# Altium PCB bms52Pcb.PcbDoc (part 1 of 2)
Units mm, origin at the board's own origin, x right, y up, seen from the top; angles counter-clockwise.
Board outline 103.58 x 54.94 mm, 2 copper layers (Top Layer, Bottom Layer); 108 components, 83 nets, 349 pads, 97 vias.
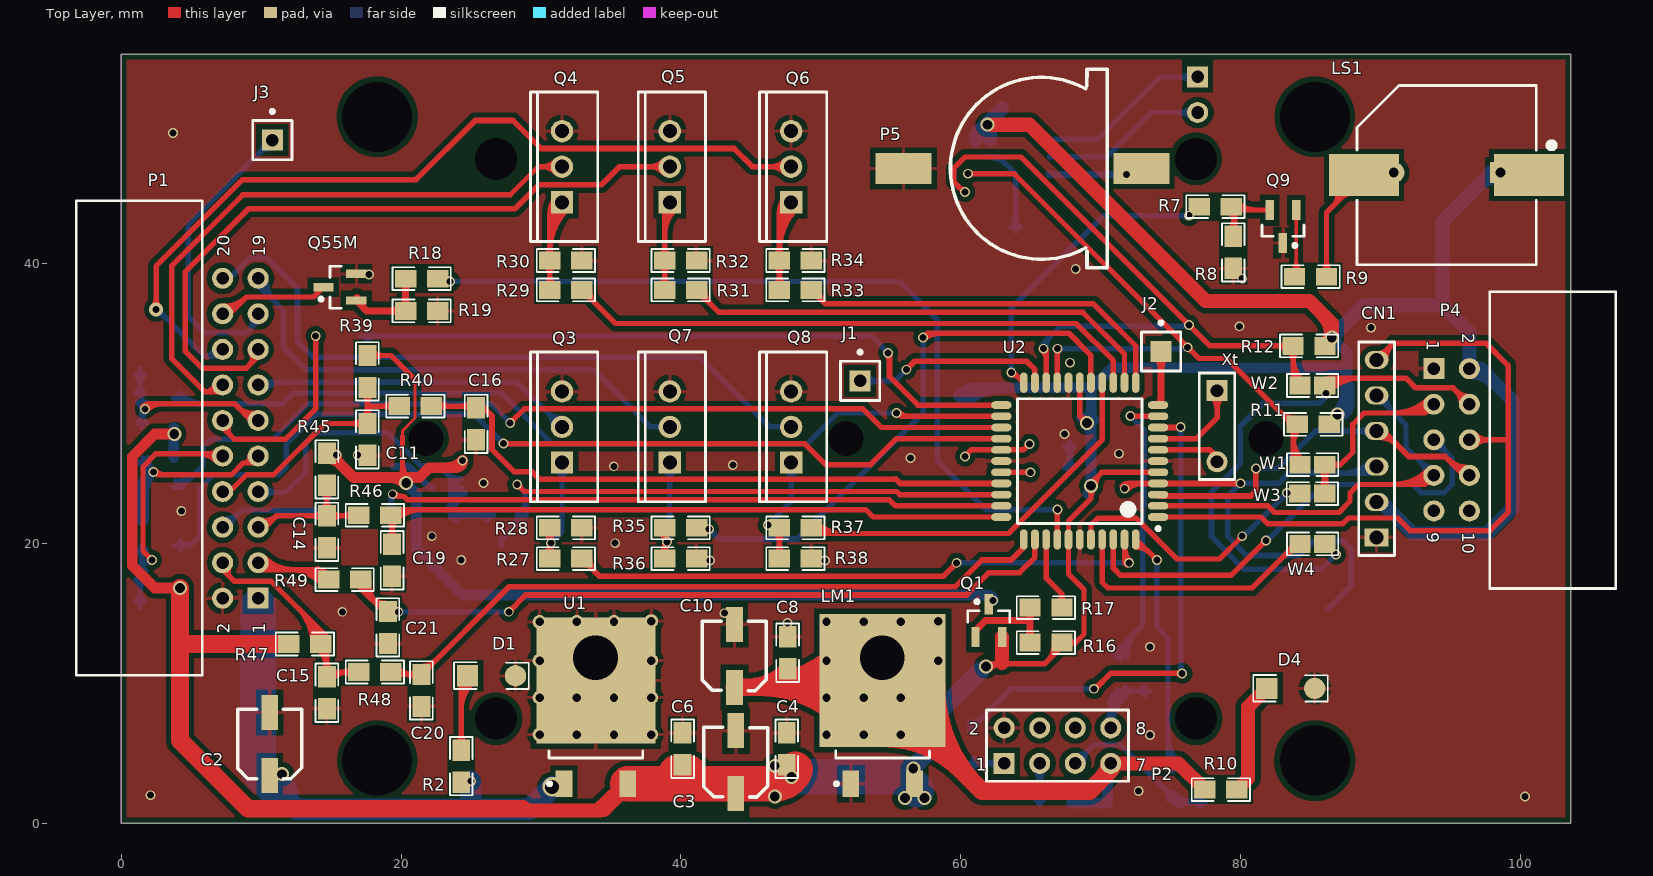
[diagram p0: Top Layer view]
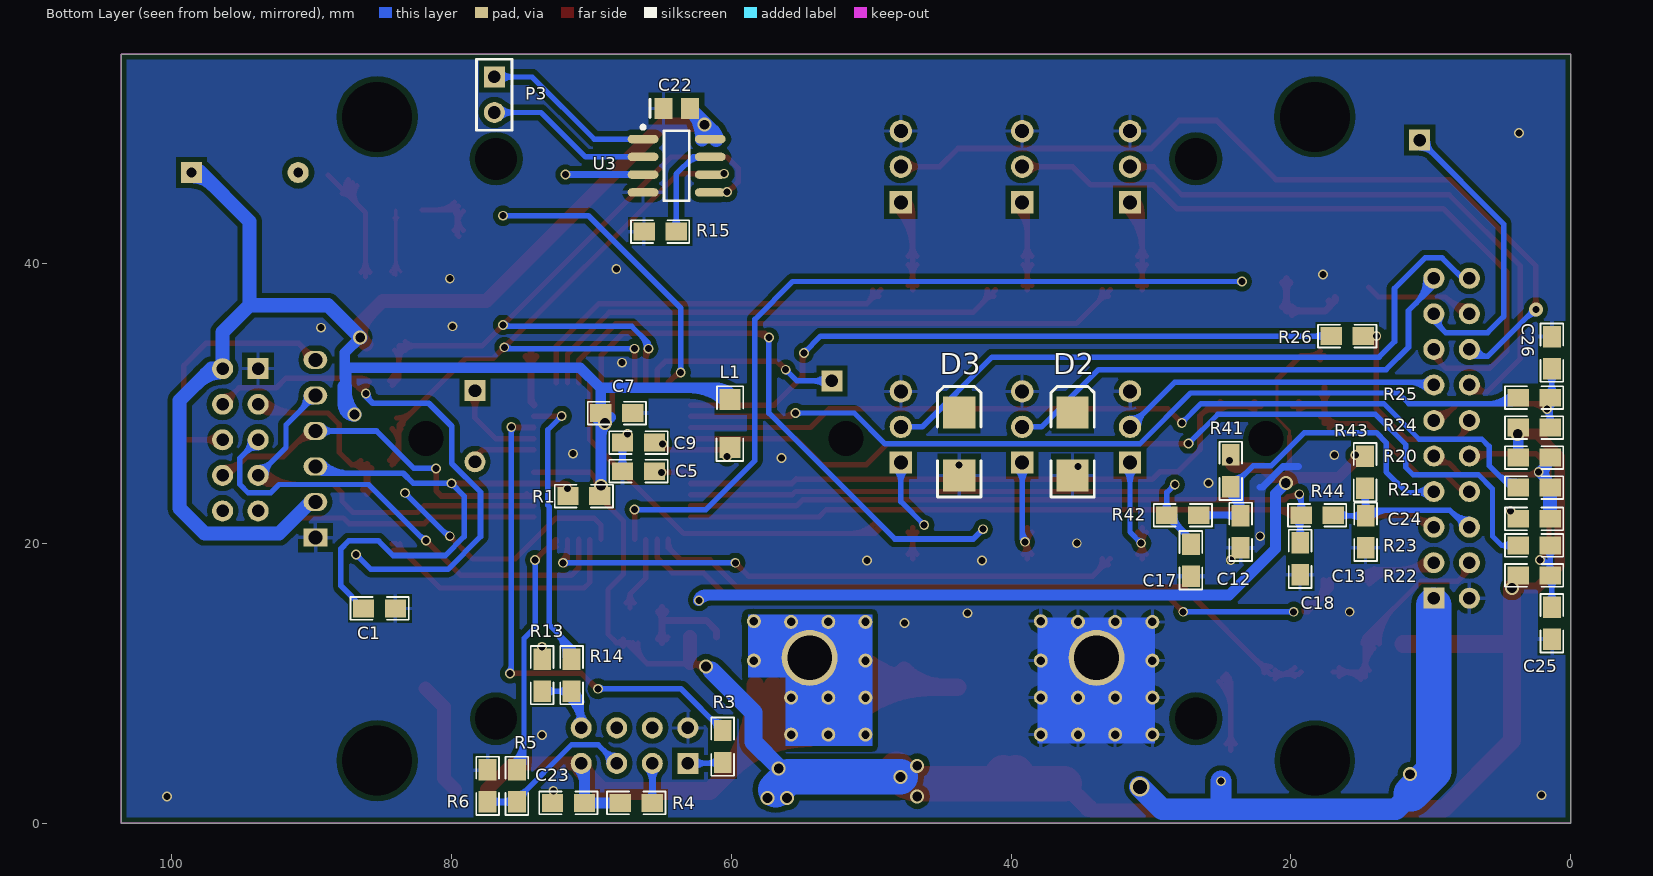
[diagram p1: Bottom Layer view, seen from below]

## Layer stack, top to bottom
Top Layer: signal copper 0.0356
Dielectric: dielectric 0.32, FR-4, Dk 4.8
Bottom Layer: signal copper 0.0356

## Board outline
0,0 103.58,0 103.58,54.94 0,54.94

## Design rules (kind name [scope] priority, off if disabled: settings)
Clearance Clearance_1 [All vs inpolygon] p1: gap=0.381
Clearance [All] p2: gap=0.2
ComponentClearance [All] p1: gap=0.051 collisioncheckmode=3 verticalgap=0.051 showdistances=FALSE
DiffPairsRouting [All] p1: maxlimit=5 minlimit=0.003 mostfreqgap=0.254 maxuncoupledlength=12.7
HoleToHoleClearance [All] p1: gap=0.254 allowstackedmicrovias=FALSE
MinimumSolderMaskSliver [All] p1: minsoldermaskwidth=0.025
PolygonConnect PolygonConnect_1 [All vs InNet('GND') and ViaDiameter] p1: connectstyle=Direct reliefconductorwidth=0.254 reliefentries=4 polygonreliefangle="90 Angle"
PolygonConnect [All] p2: connectstyle=Relief reliefconductorwidth=0.254 reliefentries=4 polygonreliefangle="90 Angle"
RoutingVias [All] p1: holewidth=0.5 width=0.8 viastyle="Through Hole" minholewidth=0 minwidth=0.3 maxholewidth=5 maxwidth=5
SilkscreenOverComponentPads [All] p1: minsilkscreentomaskgap=0.01
SolderMaskExpansion [All] p1: expansion=0.01
TestPointUsage [All] p1: valid=0 allowmultiple=FALSE
Testpoint [(IsPad And (OnTopLayer Or OnBottomLayer))] p1: side=3 testpointundercomponent=TRUE minsize=1.016 maxsize=2.54 preferedsize=1.524 minholesize=0 maxholesize=1.016 preferedholesize=0.813 testpointgrid=0.025 style=297 order=0123456789
Width [All] p1: maxlimit=5.08 minlimit=0.2 preferedwidth=0.7
19 further rules are at their usual default settings.

## Components (designator, comment, footprint, x,y, rotation, side; value= is the part's Value field where it differs from the comment)
C1 "10uF/10v" C0805N 85.2,15.3 r180 bottom
C2 "220uF/10V" 100uf16V 10.6,5.9 r270 top
C3 "100uF/10V" 100uf16V 43.9,4.6 r270 top
C4 "10uF/10V" C0805N 47.6,5.235 r90 top
C5 "Cap" C0805#1 66.59,25.17 r180 bottom
C6 "Y" C0805#1 40.09,5.343 r90 top
C7 "Cap" C0805#1 68.19,29.27 r0 bottom
C8 "Y" C0805#1 47.6,12.2 r90 top
C9 "Cap" C0805#1 66.641,27.17 r0 bottom
C10 "100uF/10V" 100uf16v 43.8,12.2 r270 top
C11 "22uF/10V" C0805N 17.558,27.5 r270 top
C12 "22uF/10V" C0805N 23.642,20.9 r270 bottom
C13 "22uF/10V" C0805N 14.7,20.9 r270 bottom
C14 "22uF/10V" C0805N 14.658,20.9 r270 top
C15 "22uF/10V" C0805N 14.658,9.4 r270 top
C16 "Cap" C0805N 25.4,28.448 r90 top
C17 "Cap" C0805N 27.1,18.7 r90 bottom
C18 "Cap" C0805N 19.3,18.8 r90 bottom
C19 "Cap" C0805N 19.4,18.7 r90 top
C20 "Cap" C0805N 21.5,9.4 r90 top
C21 "Cap" C0805N 19.1,13.9 r90 top
C22 "Cap" C0805#2 63.89,51.07 r180 bottom
C23 "Y" C0805n 71.7,1.4 r180 bottom
C24 "Y" C0805n 2.708,21.7 r180 bottom
C25 "Y" C0805n 1.313,14.2 r90 bottom
C26 "Y" C0805n 1.4,33.7 r270 bottom
CN1 "Pin Header 6" HDR1X6 89.7,20.4 r90 top
D1 "RLED" D1206 26.7,10.4 r0 top
D2 "D Schottky" SMB 35.6,27.1 r90 bottom
D3 "D Schottky" SMB 43.7,27.1 r90 bottom
D4 "RLED" D1206 83.8,9.5 r0 top
J1 "Socket" PIN1#1 52.8,31.6 r0 top
J2 "Socket" PIN1#2 74.3,33.7 r0 top
J3 "Socket" PIN1#1 10.8,48.8 r0 top
L1 "Inductor" R1206 60.19,28.47 r90 bottom
LM1 "LM1117DT-3.3" TD03B_N_Heat#1 46.69,-5.83 r0 top
LS1 "Buzzer" ABSM-1574 100.6,46.3 r180 top
P1 "Header 10X2" HDR2X10 9.79,16.07 r90 top
P2 "Header 4X2H" HDR2X4 63.09,4.27 r0 top locked
P3 "xtall" HDR1X2 76.99,51.97 r270 bottom
P4 "Header 5X2" HDR2X5 93.79,32.47 r270 top
P5 "JackBattery" "jack battery" 64.39,46.77 r90 top
Q1 "PNP" NPN 62,14.3 r0 top
Q3 "TIP122" TO-220-AB 31.5,28.31 r90 top
Q4 "TIP122" TO-220-AB 31.5,46.9 r90 top
Q5 "TIP122" TO-220-AB 39.2,46.9 r90 top
Q6 "TIP122" TO-220-AB 47.87,46.9 r90 top
Q7 "TIP122" TO-220-AB 39.2,28.31 r90 top
Q8 "TIP122" TO-220-AB 47.87,28.31 r90 top
Q9 "QNPN" NPN 83,42.8 r180 top
Q55M "BC817" NPN 15.8,38.3 r90 top
R1 "" R0805 70.49,23.37 r180 bottom
R2 "10K" R0805 24.3,4.1 r90 top
R3 "1K" R0805 60.6,5.5 r90 bottom
R4 "1K" R0805 66.8,1.442 r0 bottom
R5 "1K" R0805 75.3,2.645 r270 bottom
R6 "2.2K" R0805 77.4,2.695 r90 bottom
R7 "1K" C0805N 78.1,44 r0 top
R8 "10K" C0805n 79.5,40.7 r90 top
R9 "100R" C0805N 84.9,39 r0 top
R10 "10K" R0805 78.6,2.4 r0 top
R11 "10K" R0805 85.2,28.5 r0 top
R12 "10K" R0805 84.849,34.1 r180 top
R13 "2.2K" R0805 73.5,10.6 r90 bottom
R14 "1K" R0805 71.4,10.6 r90 bottom
R15 "10K" R0805 65.09,42.27 r0 bottom
R16 "10K" R0805 66.1,12.9 r0 top
R17 "1K" R0805 66.1,15.4 r0 top
R18 "1K" R0805 21.5,38.9 r0 top
R19 "10K" R0805 21.5,36.6 r0 top
R20 "10K" R0805 2.6,26.12 r180 bottom
R21 "100R" R0805 2.6,23.98 r180 bottom
R22 "10K" R0805 2.6,17.7 r180 bottom
R23 "100R" R0805 2.6,19.84 r180 bottom
R24 "10K" R0805 2.6,28.26 r180 bottom
R25 "100R" R0805 2.6,30.4 r180 bottom
R26 "470R" R0805 15.949,34.8 r180 bottom
R27 "1K" R0805 31.749,18.9 r180 top
R28 "10K" R0805 31.8,21.1 r0 top
R29 "1K" R0805 31.749,38.1 r180 top
R30 "10K" R0805 31.8,40.2 r0 top
R31 "1K" R0805 39.949,38.1 r180 top
R32 "10K" R0805 40,40.2 r0 top
R33 "1K" R0805 48.149,38.1 r180 top
R34 "10K" R0805 48.2,40.2 r0 top
R35 "1K" R0805 39.949,21.1 r180 top
R36 "10K" R0805 40,18.9 r0 top
R37 "1K" R0805 48.149,21.1 r180 top
R38 "10K" R0805 48.2,18.9 r0 top
R39 "10K" R0805 17.6,32.3 r90 top
R40 "100R" R0805 21,29.8 r180 top
R41 "10K" R0805 24.3,25.2 r90 bottom
R42 "100R" R0805 27.7,22 r180 bottom
R43 "10K" R0805 14.7,25.1 r90 bottom
R44 "100R" R0805 18.1,22 r180 bottom
R45 "10K" R0805 14.7,25.3 r90 top
R46 "100R" R0805 18.1,22 r180 top
R47 "10K" R0805 13.1,12.8 r180 top
R48 "100R" R0805 18.1,10.8 r180 top
R49 "100R" R0805 15.945,17.4 r180 top
U1 "MC7805CD2T" TD03B_N_Heat#2 26.19,-5.83 r0 top
U2 "ATmega32L-8AI" 44A_L 68.49,25.87 r180 top
U3 "DS1307Z" SOIC8N_N 63.89,46.97 r180 bottom
W1 "Jumper" jumper 85.113,25.36 r0 top
W2 "Jumper" jumper 85.113,31.019 r0 top
W3 "Jumper" jumper 85.1,23.3 r0 top
W4 "Jumper" jumper 85.113,19.7 r0 top
Xt "Header 3" HDR1X3 78.3,30.9 r270 top (schematic designator P6)

## Footprints (in the part's own frame and the unit in brackets; to place one, negate y for a bottom-side part, rotate by r counter-clockwise, add the part's x,y. Pads: shape width x height; smd on the part's side, far side on the other; paste and mask are expansions set on the pad)
44A_L [mm] "Thin QFP, 44-Leads, Body 10x10mm, Pitch 0.8mm, IPC High Density"
  oval 1.45x0.55 smd: 1(-5.6,4) 2(-5.6,3.2) 3(-5.6,2.4) 4(-5.6,1.6) 5(-5.6,0.8) 6(-5.6,0) 7(-5.6,-0.8) 8(-5.6,-1.6) 9(-5.6,-2.4) 10(-5.6,-3.2) 11(-5.6,-4) 23(5.6,-4) 24(5.6,-3.2) 25(5.6,-2.4) 26(5.6,-1.6) 27(5.6,-0.8) 28(5.6,0) 29(5.6,0.8) 30(5.6,1.6) 31(5.6,2.4) 32(5.6,3.2) 33(5.6,4)
  oval 0.55x1.45 smd: 12(-4,-5.6) 13(-3.2,-5.6) 14(-2.4,-5.6) 15(-1.6,-5.6) 16(-0.8,-5.6) 17(0,-5.6) 18(0.8,-5.6) 19(1.6,-5.6) 20(2.4,-5.6) 21(3.2,-5.6) 22(4,-5.6) 34(4,5.6) 35(3.2,5.6) 36(2.4,5.6) 37(1.6,5.6) 38(0.8,5.6) 39(0,5.6) 40(-0.8,5.6) 41(-1.6,5.6) 42(-2.4,5.6) 43(-3.2,5.6) 44(-4,5.6)
  silkscreen extent -5.72,-4.45 4.45,4.95, body extent -5,-5 5,5, height 1.2
100uf16V [mm]
  rect 2.5x1.2 smd: 1(2.496,0.017) 2(-2.004,0.017)
  silkscreen extent -2.24,-2.27 2.73,2.3, body extent -2.24,-2.27 2.76,2.3, height 5.6
100uf16v [mm]
  rect 2.5x1.2 smd: 1(2.496,0.017) 2(-2.004,0.017)
  silkscreen extent -2.24,-2.27 2.73,2.3, body extent -2.24,-2.27 2.76,2.3, height 5.6
ABSM-1574 [mm] "Magnetic Transducer Buzzer"
  rect 5x3 smd: 1(0,0) 2(11.8,0)
  rect 1.5x1.5 hole 0.7: 1A(2.048,-0.182)
  round 1.5 hole 0.7: 2A(9.668,-0.182)
  silkscreen extent -1.83,-6.4 12.3,6.4
C0805#1 [mil]
  rect 60x50 smd: 1(44,-1) 2(-46,-1)
  silkscreen extent -83,-33 81,31, body extent -60,-27 58,25, height 43
C0805#2 [mil] "Chip Capacitor; Body 2.0 x 1.2 mm (LxW typ)"
  rect 51.18x59.06 smd: 1(-37.4,0) 2(37.4,0)
  silkscreen extent -75,-26 -75,26
C0805N [mil]
  rect 60x50 smd: 1(-41.76,1.67) 2(48.24,1.67)
  silkscreen extent -79,-30 85,34, body extent -56,-24 62,28, height 43
C0805n [mil]
  rect 60x50 smd: 1(-41.76,1.67) 2(48.24,1.67)
  silkscreen extent -79,-30 85,34, body extent -56,-24 62,28, height 43
D1206 [mil]
  rect 60x60 smd: 1(-76.87,5)
  round 60 smd: 2(58.13,5)
  silkscreen extent -115,-32 95,43, body extent -86,-34 67,44, height 41
HDR1X2 [mm]
  rect 1.5x1.5 hole 0.9: 1(-1.346,0.076)
  round 1.5 hole 0.9: 2(1.194,0.076)
  silkscreen extent -2.62,-1.19 2.46,1.35, body extent -2.62,-1.19 2.46,1.35, height 10
HDR1X3 [mm] "Connector; Header; 3 Position"
  rect 1.5x1.5 hole 0.9: 1(0,0)
  round 1.5 hole 0.9: 3(5.08,0)
  silkscreen extent -1.27,-1.27 6.35,1.27
HDR1X6 [mm] "Connector; Header; 6 Position"
  rect 1.3x1.7 hole 1: 1(0,0)
  oval 1.3x1.7 hole 1: 2(2.54,0) 3(5.08,0) 4(7.62,0) 5(10.16,0) 6(12.7,0)
  silkscreen extent -1.27,-1.27 13.97,1.27
HDR2X4 [mm] "Connector; Header; 4x2 Position"
  rect 1.5x1.5 hole 0.9: 1(0,0)
  round 1.5 hole 0.9: 2(0,2.54) 3(2.54,0) 4(2.54,2.54) 5(5.08,0) 6(5.08,2.54) 7(7.62,0) 8(7.62,2.54)
  silkscreen extent -1.27,-1.27 8.89,3.81
HDR2X5 [mm] "Connector; Header; 5x2 Position"
  rect 1.5x1.5 hole 0.9: 1(0,0)
  round 1.5 hole 0.9: 2(0,2.54) 3(2.54,0) 4(2.54,2.54) 5(5.08,0) 6(5.08,2.54) 7(7.62,0) 8(7.62,2.54) 9(10.16,0) 10(10.16,2.54)
  silkscreen extent -5.5,4 15.7,13
HDR2X10 [mm] "Connector; Header; 10x2 Position"
  rect 1.5x1.5 hole 0.9: 1(0,0)
  round 1.5 hole 0.9: 2(0,2.54) 3(2.54,0) 4(2.54,2.54) 5(5.08,0) 6(5.08,2.54) 7(7.62,0) 8(7.62,2.54) 9(10.16,0) 10(10.16,2.54) 11(12.7,0) 12(12.7,2.54) 13(15.24,0) 14(15.24,2.54) 15(17.78,0) 16(17.78,2.54) 17(20.32,0) 18(20.32,2.54) 19(22.86,0) 20(22.86,2.54)
  silkscreen extent -5.5,4 28.4,13
"jack battery" [mm]
  rect 2.2x4 smd: 1(0,8.5) 2(0,-8.5)
  silkscreen extent -7.1,-6.07 7.1,5.13
jumper [mil]
  rect 60x50 smd: 1(-35,10) 2(35,10)
  silkscreen extent -71,-22 73,42, body extent -57,-16 59,36, height 26
NPN [mm]
  rect 0.6x1.45 smd: 1(-0.956,-1.004) 2(0.944,-1.004) 3(-0.006,1.346)
  silkscreen extent -1.51,0.07 1.49,1.65, body extent -1.51,-0.53 1.49,0.87, height 1.1
PIN1#1 [mm] "Connector; Plug"
  rect 1.5x1.5 hole 0.9: 1(0,0)
  silkscreen extent -1.4,-1.4 1.4,2.17
PIN1#2 [mm] "Connector; Plug"
  rect 1.5x1.5 smd: 1(0,0)
  silkscreen extent -1.4,-1.4 1.4,2.17
R0805 [mil]
  rect 60x50 smd: 1(44,0) 2(-46,0)
  silkscreen extent -83,-32 81,32, body extent -60,-26 58,26, height 26
R1206 [mil]
  rect 60x60 smd: 1(-64,-4.5) 2(71,-4.5)
  silkscreen extent -102,-41 108,34, body extent -75,-42 81,34, height 24
SMB [mm] "DO-214-AA/SMB; 2 C-Bend Leads; Body 5.3 x 3.6 mm, inc. leads (LxW)"
  rect 2.3x2.3 smd: 1(-2.25,0) 2(2.25,0)
  silkscreen extent -3.8,-1.55 4.1,1.55
SOIC8N_N [mm] "SOIC, 8-Leads, Body 4.9x3.9mm, Pitch 1.27mm, IPC Medium Density"
  oval 2.2x0.6 smd: 1(-2.4,1.905) 2(-2.4,0.635) 3(-2.4,-0.635) 4(-2.4,-1.905) 5(2.4,-1.905) 6(2.4,-0.635) 7(2.4,0.635) 8(2.4,1.905)
  silkscreen extent -2.53,-2.5 0.9,2.88, body extent -1.95,-2.45 1.95,2.45, height 1.75
TD03B_N_Heat#1 [mm]
  rect 1.2x1.9 smd: 1(5.442,8.646) 3(10.002,8.646)
  round 1 hole 0.6: 4(3.708,12.157) 4(3.708,14.799) 4(3.708,17.446) 4(3.708,20.209) 4(6.367,12.157) 4(6.367,14.799) 4(6.367,20.209) 4(9.025,12.157) 4(9.025,14.799) 4(9.025,20.209) 4(11.684,17.446) 4(11.684,20.26)
  round 4 hole 3.2: 4(7.696,17.644)
  rect 9x9.5 smd: 4(7.722,16.014)
  silkscreen extent 4.29,8.52 11.07,11, body extent 4.37,10.5 11.07,16.7, height 2.38
TD03B_N_Heat#2 [mm]
  rect 1.2x1.9 smd: 1(5.442,8.646) 3(10.002,8.646)
  round 1 hole 0.6: 4(3.708,12.157) 4(3.708,14.799) 4(3.708,17.446) 4(3.708,20.209) 4(6.367,12.157) 4(6.367,14.799) 4(6.367,20.209) 4(9.025,12.157) 4(9.025,14.799) 4(9.025,20.209) 4(11.684,12.157) 4(11.684,14.799) 4(11.684,17.446) 4(11.684,20.26)
  round 4 hole 3.2: 4(7.696,17.644)
  rect 8.5x9 smd: 4(7.722,16.014)
  silkscreen extent 4.29,8.52 11.07,11, body extent 4.37,10.5 11.07,16.7, height 2.38
TO-220-AB [mm] "TO, Thru-Hole, Vertical, Heatsink Mounted; 3 In-Line Leads; Pitch 2.54 mm"
  rect 1.6x1.6 hole 1: 1(-2.54,0)
  round 1.6 hole 1: 2(0,0) 3(2.54,0)
  silkscreen extent -5.35,-2.55 5.35,2.25

## Part data
C1: library part EKO00DC133X00, "Aluminum Electrolytic Capacitor, Radial Style with Long Leads: 3.3uF, 400V"
C2 C3 C4 C10 C11 C12 C13 C14 C15: library part "Cap Pol1", "Polarized Capacitor (Radial)"
C5 C7 C9 C16 C17 C18 C19 C20 C21 C22: "Capacitor"
C6 C8 C23 C24 C25 C26: library part Cap, "Capacitor"
CN1: library part "Header 6", "Header, 6-Pin"
D1 D4: library part LED1, "Typical RED GaAs LED"
D2 D3: "Schottky Diode"
LM1: library part LM1117DT-1.8, "800mA Low-Dropout Linear Regulator, 3-pin TO-252"
LS1: "Magnetic Transducer Buzzer"
P1: "Header, 10-Pin, Dual row"
P2: "Header, 4-Pin, Dual row, Right Angle"
P3 P5: library part "Header 2", "Header, 2-Pin"
P4: "Header, 5-Pin, Dual row"
Q1: "PNP Bipolar Transistor"
Q3 Q4 Q5 Q6 Q7 Q8: library part 2N3904, "NPN General Purpose Amplifier"
Q9: "NPN Bipolar Transistor"
Q55M: library part 2N2222, "General Purpose Transistor NPN Silicon"
R1 R2 R3 R4 R5 R6 R7 R8 R9 R10 R11 R12 R13 R14 R15 R16 R17 R18 R19 R20 R21 R22 R23 R24 R25 R26 R27 R28 R29 R30 R31 R32 R33 R34 R35 R36 R37 R38 R39 R40 R41 R42 R43 R44 R45 R46 R47 R48 R49: library part Res1, "Resistor"
U1: library part MC7809CD2T, "Three-Terminal Positive Voltage Regulator"
U2: "8-Bit AVR Microcontroller with 32K Bytes of In-System Programmable Flash Memory"
U3: "64 X 8 Serial Real-Time Clock"
W1 W2 W3 W4: "Jumper Wire"
Xt: "Header, 3-Pin"

## Free pads (board coordinates)
  round 0 hole 5: 0(18.29,4.47) 0(18.29,50.47) 0(85.29,4.47) 0(85.29,50.47)
  round 0.8 hole 2.5: 0(21.79,27.47) 0(81.79,27.47)
  round 0 hole 3: 0(26.79,7.47) 0(26.79,47.47) 0(76.79,7.47) 0(76.79,47.47)
  round 0 hole 2.5: 0(51.79,27.47)

## Via types
v1: diameter 0.7, hole 0.5, Top Layer to Bottom Layer, tented both sides, 77 vias
v2: diameter 1, hole 0.7, Top Layer to Bottom Layer, tented both sides, 16 vias
v3: diameter 0.7, hole 0.5, Top Layer to Bottom Layer, 2 vias
v4: diameter 1.4, hole 1, Top Layer to Bottom Layer, tented both sides, 1 vias
v5: diameter 1, hole 0.5, Top Layer to Bottom Layer, tented both sides, 1 vias

## Nets (pads, with @x,y where several pads share a name; then routed paths per layer and width w, separated by ;. In a path a pad name is that pad's centre, name@x,y a point inside that pad or via, vN(x,y) a via of type N, cw(c..) or ccw(c..) an arc to the next point about the centre after c; other vN are vias at no path point)
3V3: C8.2 C10.1 C23.2 LM1.4 P2.7 R4.1 R10.2 | length 145.2
  Top Layer w1: P2.7@70.71,4.27 75.562,4.27 R10.2@77.432,2.4
  Top Layer w1.27: C10.1@43.817,9.704 53.932,9.704 ccw(c53.932,8.632) LM1.4@52.931,9.018 ; 44.525,9.704 ccw(c44.525,19.82) LM1.4@51.679,12.667 ; 44.727,9.704 ccw(c44.727,13.803) 47.625,10.905 ccw(c50.524,13.803) LM1.4@50.524,9.704 ; 45.636,9.704 cw(c45.636,1.158) LM1.4@51.679,7.201 ; 45.997,9.704 ccw(c45.997,20.203) LM1.4@53.421,12.779 ; 47.591,9.704 ccw(c47.591,16.754) LM1.4@52.577,11.769 ; 48.702,9.704 cw(c48.702,4.224) LM1.4@52.577,8.099 ; 48.95,9.704 cw(c48.95,7.52) LM1.4@50.494,9.064 ; 49.063,9.704 ccw(c49.063,17.137) LM1.4@54.319,11.881 ; LM1.4@50.303,9.064 cw(c51.847,7.52) LM1.4@51.847,9.704 ; LM1.4@51.608,9.704 cw(c51.608,7.52) LM1.4@53.152,9.064 ; LM1.4@52.129,9.704 ccw(c52.129,14.071) LM1.4@55.217,10.983 ; LM1.4@53.211,11.814 ccw(c56.169,11.814) LM1.4@54.077,9.723 ; LM1.4@53.696,10.636 cw(c52.966,9.388) LM1.4@54.412,9.388 ; LM1.4@54.412,6.069 cw(c54.412,-1.945) 60.078,3.722 ; LM1.4@54.412,7.339 cw(c54.412,2.391) LM1.4@57.91,5.89 ; LM1.4@54.412,10.184 LM1.4@54.412,9.388 ; LM1.4@54.481,11.814 ccw(c60.505,11.814) LM1.4@56.245,7.555 ; LM1.4@54.854,8.946 ccw(c55.376,9.469) LM1.4@55.791,8.857 ; LM1.4@55.113,10.658 ccw(c55.912,9.388) LM1.4@54.412,9.388 ; LM1.4@55.58,8.969 ccw(c57.39,8.969) LM1.4@56.11,7.69 ; LM1.4@55.751,11.814 ccw(c64.841,11.814) 58.413,5.387 ; LM1.4@57.006,9.891 ccw(c64.188,9.77) 59.109,4.691 ; LM1.4@58.276,9.869 ccw(c68.354,9.7) 61.227,2.573 ; 70.188,3.288 ccw(c69.207,4.27) P2.7@70.595,4.27 ; P2.7@70.71,4.27 70.71,3.81 69.2,2.3 61.5,2.3 LM1.4@54.412,9.388
  Bottom Layer w0.762: R4.1@67.918,1.442 C23.2@70.475,1.442 70.475,4.035 P2.7@70.71,4.27 ; 70.475,2.811 cw(c72.169,2.811) P2.7@70.971,4.009
+5V: C3.1 C4.1 C6.2 C7.1 C22.2 CN1.2 L1.2 LM1.3 LS1.1 LS1.1A P4.2 Q1.2 R1.1 R11.1 R12.2 R16.1 R20.2 R22.2 R24.2 R47.1 U1.3 U2.5 U2.17 U2.38 U3.8 | length 293.7
  Top Layer w0.381: v2@61.994,11.394 65.994,11.394 R16.1@67.5,12.9 ; v2@62.019,10.981 cw(c63.016,9.984) 63.016,11.394 ; 66.199,11.599 ccw(c65.096,12.702) R16.1@66.648,12.856 ; 66.768,12.168 ccw(c66.131,12.805) R16.1@67.027,12.894 ; R16.1@67.218,12.9 R16.1@67.5,12.9 ; R16.1@67.708,12.645 cw(c68.2,12.299) 68.2,12.9 ; R16.1@67.708,13.156 ccw(c68.2,13.501) 68.2,12.9 ; U2.17@68.49,31.47 68.49,29.11 ; v2@68.691,28.608 ccw(c68.005,28.625) 68.49,29.11 ; v2@68.992,28.909 cw(c68.975,29.595) 68.49,29.11 ; v2(69,28.6) 68.49,29.11 ; v2@69.081,23.881 cw(c68.553,23.353) 69.3,23.353 cw(c70.047,23.353) v2@69.519,23.881 ; v2(69.3,24.1) 69.3,23.2 67.69,21.59 U2.38@67.69,20.27 67.69,17.81 68.8,16.7 68.8,13.5 68.2,12.9 ; v2@69.3,24.3 70.07,25.07 U2.5@74.09,25.07 ; v2@69.61,24.1 cw(c70.84,24.1) 69.97,24.97 ; R16.1@67.5,12.9 68.2,12.9
  Top Layer w0.762: v2(3.8,27.8) 2.4,27.8 0.788,26.188 0.788,18.412 2.4,16.8 v2(4.2,16.8)
  Top Layer w1: 28.687,1.031 28.829,0.889 34.214,0.889 34.417,1.092
  Top Layer w1.016: v2@62.1,49.9 64.9,49.9 77.5,37.3 84.9,37.3 86.5,35.7 v2(86.5,34.7) ; 62.944,11.45 Q1.2@62.944,13.296 ; 85.807,36.393 cw(c84.113,34.7) R12.2@86.508,34.7 ; R12.2@86.055,34.19 ccw(c84.98,35.264) 86.5,35.264
  Top Layer w1.27: v2(4.2,16.8) 4.2,5.9 9.069,1.031 28.687,1.031 ; 4.4,12.8 R47.1@11.982,12.8 ; 34.417,1.092 34.468,1.092 U1.3@36.192,2.816
  Top Layer w2.54: U1.3@36.192,2.816 46.716,2.816 ccw(c46.716,4.343) C4.1@48.157,3.838 ; 38.674,2.816 ccw(c38.674,5.49) C6.2@40.564,3.599 ; C6.2@39.666,3.599 ccw(c41.557,5.49) 41.557,2.816 ; 46.116,2.816 ccw(c46.116,5.49) C4.1@48.007,3.599
  Bottom Layer w0.762: R20.2@3.768,26.12 R24.2@3.768,28.26 ; L1.2@59.806,30.543 cw(c61.151,29.198) 61.151,31.1 ; L1.2@60.076,30.273 60.902,31.1 69.352,31.1 70.79,32.537 87.3,32.537 87.5,32.337 87.5,31.1 ; L1.2@60.076,30.654 ccw(c60.076,31.574) 60.726,30.924 ccw(c61.377,30.273) L1.2@60.457,30.273 ; L1.2@60.345,30.004 cw(c62.991,27.358) 62.991,31.1 ; C7.1@68.598,29.002 ccw(c69.18,29.584) C7.1@69.512,28.83 ; v2@68.916,28.516 cw(c67.988,27.588) 69.3,27.588 ; C7.1@68.916,28.684 ccw(c67.97,29.63) C7.1@69.308,29.63 ; C7.1@68.946,28.706 ccw(c68.647,29.295) C7.1@69.308,29.295 69.308,30.892 ; v2(69,28.6) 69.3,28.3 v2(69.3,24.1) cw(c68.537,24.1) R1.1@69.068,23.552 ; R1.1@69.066,23.55 ccw(c68.5,24.115) v2@69.3,24.115 ; v2(86.5,34.7) 87.6,33.6 87.6,31.8
  Bottom Layer w1.016: U3.8@61.067,48.822 cw(c61.884,48.858) 61.306,49.436 ; 61.5,49.4 61.5,49.63 C22.2@62.94,51.07 ccw(c65.017,48.993) U3.8@62.082,48.866 ; v2(86.5,34.7) 88.8,37 94.4,37 ; v2@86.9,29.192 ccw(c86.892,29.9) 87.6,29.9 ; v2(86.9,29.2) 87.6,29.9 ; v2@86.906,29.194 ccw(c85.229,30.871) 87.6,30.871 ; 87.6,31.2 87.6,29.9 ; CN1.2@89.7,22.94 90.06,22.94 92.3,20.7 97.6,20.7 99.4,22.5 99.4,30.2 97.13,32.47 P4.2@96.33,32.47 96.33,35.07 94.4,37 ; P4.2@96.33,32.228 cw(c96.33,29.712) 98.109,31.491 ; P4.2@96.436,32.253 cw(c96.855,31.395) 97.53,32.07 ; 97.012,45.602 cw(c98.552,44.062) LS1.1A@98.552,46.24 ; LS1.1A@97.95,46.54 94.4,42.99 94.4,37
  Bottom Layer w1.27: v2(56.6,3.9) 56.6,4 58.4,5.8 58.4,7.9 61.4,10.9
  Bottom Layer w2.54: v2(47.9,3.3) 55.9,3.3 56.8,2.4
  other v2: 56,1.8 57.4,1.8 46.7,1.9 46.7,4.1 61.8,11.2 61.9,49.9
+12: C2.1 P1.1 R2.2 U1.1 | length 36.7
  Bottom Layer w1.524: 11.4,2.1 12.513,0.987 25,0.987 ; v1(25,3) 25,0.987 ; v4(30.8,2.6) 29.187,0.987 25,0.987
  Bottom Layer w2.54: P1.1@9.79,15.57 9.79,3.71 11.4,2.1
  other v2: 11.5,3.5
BUZZ: R7.1 U2.22 | length 23
  Top Layer w0.4: v1@63.6,32.05 cw(c63.6,31.302) 64.129,31.831 ; v1(63.6,32.2) 63.76,32.2 U2.22@64.49,31.47
  Bottom Layer w0.381: 70.197,43.4 v1(76.3,43.4) ; v1@76.187,43.287 ccw(c75.915,43.015) 75.915,43.4 ccw(c75.915,43.785) v1@76.187,43.513
  Bottom Layer w0.4: v1@63.494,32.306 ccw(c63.238,32.562) 63.6,32.562 ccw(c63.962,32.562) v1@63.706,32.306 ; v1(63.6,32.2) 63.6,36.803 70.197,43.4
GND: C1.2 C2.2 C3.2 C4.2 C5.2 C6.1 C7.2 C8.1 C9.1 C10.2 C11.2 C12.2 C13.2 C14.2 C15.2 C16.1 C17.1 C18.1 C19.1 C20.1 C21.1 C22.1 C23.1 C24.1 C25.1 C26.1 CN1.1 D1.2 D2.1 D3.1 D4.2 LM1.1 P1.2 P2.2 P4.1 P5.1 Q3.3 Q4.3 Q5.3 Q6.3 Q7.3 Q8.3 Q9.3 Q55M.2 R6.1 R8.1 R13.1 R15.1 R19.1 R28.1 R30.1 R32.1 R34.1 R36.1 R38.1 U1.4 U2.6 U2.18 U2.28 U2.39 U3.4 | length 8.3
  Bottom Layer w0.5: 19.446,25.476 20.558,25.476 22.034,24 22.2,24 ; C5.2@67.486,25.417 ccw(c66.829,26.074) 67.758,26.074 ccw(c68.688,26.074) C5.2@68.031,25.417 ; C9.1@67.486,26.923 cw(c66.829,26.266) 67.758,26.266 cw(c68.688,26.266) C9.1@68.031,26.923 ; C5.2@67.758,25.145 C9.1@67.758,27.195
  other v1: 100.3,1.9 2.1,2 72.7,2.3 73.5,6.3 73.5,12.6 47.6,14.3 43.1,15 15.8,15.1 42.08,18.773 50.28,18.773 24.3,18.8 35.3,20 22.2,20.5 4.3,22.3 25.9,24.3 35.2,25.5 43.7,25.6 56.4,26.1 16.9,26.3 71.3,26.4 67.4,27.8 67.8,32.9 89.3,35.4 79.9,35.5 80.1,38.9 68.2,39.6 3.7,49.3
  other v3: 17.7,39.2
HUMIDADC01: C16.2 R40.2 U2.30 | length 49.4
  Top Layer w0.4: R40.2@22.168,29.8 25.8,29.8 C16.2@25.927,29.673 ; R40.2@22.603,29.492 cw(c23.346,28.75) 23.346,29.8 cw(c23.346,30.85) R40.2@22.603,30.108 ; C16.2@25.05,29.492 ccw(c24.307,28.75) 24.307,29.8 ccw(c24.307,30.85) C16.2@25.05,30.108 ; C16.2@25.358,29.673 C16.2@25.927,29.673 ; C16.2@25.366,29.512 cw(c25.628,28.517) 26.356,29.244 ; U2.30@62.89,24.27 55.665,24.27 55.345,24.59 55.324,24.57 29.9,24.57 29.37,25.1 28.1,25.1 26.5,26.7 26.5,29.1 C16.2@25.927,29.673
HUMIDADC02: C17.2 R42.2 U2.31 | length 44.5
  Top Layer w0.381: v1@28.3,24.041 cw(c28.3,23.655) 28.572,23.928 cw(c28.845,24.2) v1@28.459,24.2 ; v1(28.3,24.2) 28.8,23.7 55.4,23.7 55.63,23.47 U2.31@62.89,23.47
  Bottom Layer w0.381: v1@28.3,24.041 cw(c28.3,23.655) 28.572,23.928 cw(c28.845,24.2) v1@28.459,24.2 ; v1(28.3,24.2) 28.868,23.632 R42.2@28.868,22 ; R42.2@28.554,22.314 ccw(c27.795,23.073) 28.868,23.073 ccw(c29.941,23.073) R42.2@29.183,22.314
  Bottom Layer w0.5: C17.2@27.142,19.925 27.142,20.274 R42.2@28.868,22 ; 27.994,21.126 ccw(c27.12,22) R42.2@28.356,22 ; R42.2@28.301,21.433 cw(c28.741,20.992) R42.2@28.741,21.615
HUMIDADC03: C18.2 R44.2 U2.32 | length 53.8
  Top Layer w0.381: v1(19.4,23.5) 19.5,23.6 19.5,23.553 19.71,23.343 20.218,23.343 20.461,23.1 54.9,23.1 55.33,22.67 U2.32@62.89,22.67 ; v1@19.513,23.613 ccw(c20.165,24.265) 20.165,23.343
  Bottom Layer w0.381: R44.2@18.954,22.314 ccw(c18.195,23.073) 19.268,23.073 ccw(c20.341,23.073) R44.2@19.583,22.314 ; C18.2@19.028,20.467 ccw(c18.269,21.226) 19.342,21.226 ccw(c20.416,21.226) C18.2@19.657,20.467 ; R44.2@19.081,21.686 cw(c18.45,21.055) 19.342,21.055 ; R44.2@19.268,22 19.268,23.368 v1(19.4,23.5) ; 19.268,22.797 cw(c20.103,22.797) v1@19.513,23.387 ; C18.2@19.342,20.025 R44.2@19.342,21.926 ; 19.342,20.799 cw(c20.596,20.799) R44.2@19.71,21.686
HUMIDADC04: C19.2 R46.2 U2.33 | length 52.6
  Top Layer w0.381: C19.2@19.043,20.367 ccw(c18.284,21.126) 19.358,21.126 ccw(c20.431,21.126) C19.2@19.672,20.367 ; R46.2@19.081,21.686 cw(c18.413,21.018) 19.358,21.018 ; C19.2@19.358,19.925 19.358,21.911 R46.2@19.268,22 19.668,22.4 53.2,22.4 53.73,21.87 U2.33@62.89,21.87 ; 19.358,20.836 cw(c20.56,20.836) 19.71,21.686 cw(c21.434,19.961) 21.434,22.4 ; R46.2@19.44,21.955 cw(c20.514,20.881) 20.514,22.4
HUMIDSENS01: C11.1 P1.8 R39.2 R40.1 | length 23.8
  Top Layer w0.381: P1.8@7.25,23.19 8.952,24.892 10.892,24.892 14.561,28.561 C11.1@17.6,28.561 ; C11.1@17.286,28.246 ccw(c16.527,27.487) 16.527,28.561 ccw(c16.527,29.634) C11.1@17.286,28.875
  Top Layer w0.4: R39.2@17.292,30.697 cw(c16.55,29.954) 17.6,29.954 cw(c18.65,29.954) R39.2@17.908,30.697 ; C11.1@17.326,29.026 ccw(c16.861,29.6) 17.6,29.6 ; C11.1@17.6,28.561 17.6,29.6 ; R39.2@17.6,31.132 17.6,29.6 ; C11.1@17.874,29.026 cw(c18.339,29.6) 17.6,29.6 ; R40.1@19.448,29.492 ccw(c18.705,28.75) 18.705,29.8 ccw(c18.705,30.85) R40.1@19.448,30.108 ; R40.1@19.882,29.8 17.8,29.8 17.6,29.6
HUMIDSENS02: C12.1 P1.7 R41.2 R42.1 | length 37.1
  Bottom Layer w0.381: P1.7@9.79,23.19 10.222,23.622 11.722,23.622 13.2,25.1 13.2,27.2 13.9,27.9 19.04,27.9 21.413,25.527 22.708,25.527 23.6,24.635 ; P1.7@10.186,23.294 cw(c10.977,22.503) 10.977,23.622 ; P1.7@10.186,24.086 ccw(c11.305,25.205) 11.305,23.622 ; 23.159,25.076 ccw(c24.3,26.217) R41.2@24.3,24.603 ; R41.2@23.7,24.535 cw(c23.323,24.159) R41.2@23.856,24.159 ; R41.2@23.856,24.167 ccw(c23.365,24.176) 23.712,24.522 ccw(c23.877,24.687) R41.2@24.022,24.505
  Bottom Layer w0.5: C12.1@23.328,22.36 ccw(c22.671,23.017) 23.6,23.017 ccw(c24.53,23.017) C12.1@23.872,22.36 ; C12.1@23.6,21.839 cw(c25.725,21.839) R41.2@24.519,23.588 ; C12.1@23.6,21.961 23.6,24.635 ; 23.6,22.791 cw(c25.068,22.791) R41.2@24.235,23.999 ; 23.6,23.743 cw(c24.412,23.743) R41.2@23.951,24.411 ; C12.1@23.639,22 R42.1@26.582,22 ; C12.1@23.872,21.688 cw(c24.625,20.936) 24.625,22 ; C12.1@23.872,22.233 ccw(c24.434,22.795) 24.434,22 ; R42.1@26.183,21.728 ccw(c25.526,21.071) 25.526,22 ccw(c25.526,22.93) R42.1@26.183,22.272
HUMIDSENS03: C13.1 P1.6 R43.2 R44.1 | length 24.5
  Bottom Layer w0.381: P1.6@7.25,20.65 7.25,20.966 8.636,22.352 14.266,22.352 C13.1@14.658,21.961 ; P1.6@7.25,21.328 ccw(c7.25,22.204) 7.869,21.585 ; P1.6@7.25,21.709 ccw(c7.25,23.504) 8.519,22.235 ; P1.6@7.809,21.15 cw(c8.716,21.15) 8.075,21.791 ; 12.946,22.352 cw(c12.946,20.376) C13.1@14.343,21.773 ; 13.866,22.352 cw(c13.866,21.296) C13.1@14.613,22.043
  Bottom Layer w0.4: C13.1@14.35,22.395 ccw(c13.607,23.138) 14.658,23.138 ccw(c15.708,23.138) C13.1@14.965,22.395 ; R43.2@14.392,23.497 cw(c13.752,22.857) 14.658,22.857 ; C13.1@14.658,22.652 cw(c15.852,22.652) R43.2@15.008,23.497 ; R43.2@14.7,23.932 14.658,23.889 C13.1@14.658,21.961 R44.1@16.943,21.961 ; C13.1@14.965,21.653 cw(c15.708,20.91) 15.708,21.961 cw(c15.708,23.011) C13.1@14.965,22.268 ; 15.71,21.961 ccw(c15.71,23.145) R44.1@16.548,22.308 ; 15.9,21.961 cw(c15.9,21.045) R44.1@16.548,21.692
HUMIDSENS04: C14.1 P1.5 R45.2 R46.1 | length 20.5
  Top Layer w0.381: P1.5@9.79,20.65 11.101,21.961 ; P1.5@9.844,21.32 ccw(c10.089,22.087) 10.658,21.518 ; P1.5@9.96,21.683 ccw(c10.302,22.759) 11.101,21.961 ; C14.1@14.386,21.646 ccw(c13.627,20.887) 13.627,21.961 ccw(c13.627,23.034) C14.1@14.386,22.275 ; C14.1@14.386,22.402 ccw(c13.627,23.161) 14.7,23.161 ccw(c15.773,23.161) C14.1@15.014,22.402 ; R45.2@14.386,23.69 cw(c13.627,22.932) 14.7,22.932 cw(c15.773,22.932) R45.2@15.014,23.69 ; R45.2@14.7,24.132 C14.1@14.7,21.961 ; C14.1@15.014,21.646 cw(c15.773,20.887) 15.773,21.961 cw(c15.773,23.034) C14.1@15.014,22.275 ; 15.687,21.961 ccw(c15.687,23.168) R46.1@16.541,22.314 ; 15.877,21.961 cw(c15.877,21.022) R46.1@16.541,21.686 ; R46.1@16.982,22 16.943,21.961 C14.1@14.7,21.961 ; 11.101,21.961 C14.1@14.7,21.961
HUMIDVCCCTRL: R17.1 U2.36 | length 6.8
  Top Layer w0.381: U2.36@66.09,20.27 66.09,17.51 67.218,16.382 ; R17.1@66.924,15.734 ccw(c66.355,16.382) 67.218,16.382 ; R17.1@67.218,15.4 67.218,16.382 ; R17.1@67.511,15.734 cw(c68.081,16.382) 67.218,16.382
HVCC: Q1.3 R39.1 R41.1 R43.1 R45.1 | length 80.7
  Top Layer w0.203: 20.1,27.6 20.1,28.038 21,28.938 21,31.7
  Top Layer w0.381: R39.1@17.6,33.418 19.282,33.418 21,31.7 ; R39.1@17.914,33.103 cw(c18.673,32.345) 18.673,33.418 cw(c18.673,34.491) R39.1@17.914,33.732 ; 19.981,24.919 ccw(c19.694,25.206) 20.1,25.206 ; v2@20.1,24.7 20.1,27.6 ; 20.1,24.789 ccw(c20.852,24.789) v2@20.32,24.257 ; 20.1,25.709 ccw(c21.772,25.709) v2@20.59,24.527
  Top Layer w0.762: R45.1@14.7,26.037 cw(c14.7,24.676) 15.662,25.638 ; R45.1@14.7,26.418 14.882,26.418 16.6,24.7 20.1,24.7 20.2,24.7 21.3,24.7 22,25.4 23.876,25.4 ; v1@15.369,26.3 ccw(c16.26,26.3) 15.63,25.67 ; 19.137,24.7 cw(c19.137,23.074) v2@20.287,24.224 ; 23.232,25.4 ccw(c23.232,27.06) v1@24.406,25.886 ; v1(24.384,25.908) 23.876,25.4 ; v1@24.415,25.906 cw(c23.876,25.94) 23.876,25.4
  Bottom Layer w0.762: v2@20.396,24.232 21.1,23.528 21.1,19.6 24.404,16.296 61.904,16.296 ; 61.418,16.296 cw(c61.418,15.018) v3@62.322,15.922 ; v3(62.3,15.9) 61.904,16.296 ; v3@62.331,15.903 ccw(c61.904,15.868) 61.904,16.296
  other v1: 15.4,26.3
  other v2: 20.371,24.308
KEY01: R21.2 U2.25 | length 67.4
  Top Layer w0.381: v1@27.8,28.76 ccw(c27.8,29.145) 28.072,28.872 ccw(c28.345,28.6) v1@27.959,28.6 ; v1@27.9,28.7 28.8,29.6 53,29.6 54.33,28.27 U2.25@62.89,28.27
  Bottom Layer w0.381: R21.2@3.768,23.98 4.28,23.98 5.842,25.542 5.842,26.924 6.35,27.432 10.832,27.432 13.372,29.972 26.428,29.972 v1(27.8,28.6) ; R21.2@3.895,24.044 ccw(c3.895,25.126) 4.66,24.36 ; R21.2@3.895,24.425 ccw(c3.895,26.426) 5.311,25.011 ; v1@27.641,28.6 ccw(c27.255,28.6) 27.528,28.872 ccw(c27.8,29.145) v1@27.8,28.76
KEY02: R23.2 U2.26 | length 71
  Top Layer w0.381: v1(27.319,27.119) 48.827,27.119 50.332,25.614 53.554,25.614 55.41,27.47 U2.26@62.89,27.47 ; v1@27.432,27.007 cw(c27.705,26.734) 27.705,27.119 cw(c27.705,27.505) v1@27.432,27.232
  Bottom Layer w0.381: R23.2@3.768,19.84 4.94,19.84 ; R23.2@4.216,19.532 cw(c4.94,18.835) 4.94,19.84 ; R23.2@4.216,20.148 ccw(c4.94,20.845) 4.94,19.84 ; 5.595,23.883 6.604,24.892 11.27,24.892 11.8,25.422 11.8,27.04 13.97,29.21 25.229,29.21 v1(27.319,27.119) ; 5.6,23.883 5.6,20.5 4.94,19.84 ; v1@27.16,27.119 ccw(c26.775,27.119) 27.047,27.392 ccw(c27.319,27.664) v1@27.319,27.279
KEY03: R25.2 U2.24 | length 67
  Top Layer w0.381: v1@55.4,29.4 55.73,29.07 U2.24@62.89,29.07 ; v1@55.513,29.413 ccw(c56.34,30.24) 56.34,29.07
  Bottom Layer w0.381: R25.2@3.768,30.4 4.196,29.972 11.572,29.972 12.334,30.734 27.166,30.734 30.8,27.1 49,27.1 51.2,29.3 v1(55.4,29.3) ; R25.2@3.94,30.445 ccw(c5.082,31.587) 5.082,29.972 ; R25.2@4.21,30.714 ccw(c6.002,32.507) 6.002,29.972 ; v1@55.287,29.187 ccw(c55.015,28.915) 55.015,29.3 ccw(c55.015,29.685) v1@55.287,29.413
KEYBUTTON01: C24.2 P1.9 R20.1 R21.1 | length 23.1
  Top Layer w0.381: v1@2.4,25.1 2.608,24.892 7.874,24.892 8.712,25.73 ; v1@2.413,25.213 ccw(c3.187,25.987) 3.187,24.892 ; 9.1,25.73 ccw(c9.1,26.242) P1.9@9.612,26.233 ; P1.9@9.231,26.24 cw(c8.712,26.249) 8.712,25.73 ; P1.9@9.79,25.73 8.712,25.73
  Bottom Layer w0.381: R21.1@1.295,24.294 ccw(c-0.123,25.712) R20.1@1.882,25.712 ; R20.1@1.295,25.806 cw(c-0.123,24.388) R21.1@1.882,24.388 ; R21.1@1.564,24.025 ccw(c0.797,24.792) 1.882,24.792 ; R20.1@1.564,26.075 cw(c0.797,25.308) 1.882,25.308 ; R21.1@1.882,23.905 cw(c3.249,23.905) v1@2.399,24.975 ; R21.1@1.882,23.98 1.882,26.12 ccw(c2.913,26.12) v1@2.382,25.237 ; 1.882,24.694 cw(c2.623,24.694) v1@2.162,25.273 ; 1.882,25.447 ccw(c2.508,25.447) v1@2.186,24.91
  Bottom Layer w1.016: C24.2@1.482,21.742 R21.1@1.482,23.98
  other v1: 2.3,25.1
KEYBUTTON02: C25.2 P1.10 R22.1 R23.1 | length 28.8
  Top Layer w0.381: v1@2.041,18.8 ccw(c1.655,18.8) 1.928,19.072 ccw(c2.2,19.345) v1@2.2,18.959 ; v1(2.2,18.8) 1.559,19.44 1.559,25.459 2.5,26.4 6.58,26.4 P1.10@7.25,25.73 ; 5.489,26.4 cw(c5.489,24.469) P1.10@6.854,25.834 ; 6.31,26.4 ccw(c6.31,27.17) P1.10@6.854,26.626 ; 6.409,26.4 cw(c6.409,25.389) P1.10@7.124,26.104
  Bottom Layer w0.381: C25.2@1.041,15.867 ccw(c0.282,16.626) 1.355,16.626 ccw(c2.428,16.626) C25.2@1.67,15.867 ; R22.1@1.041,17.386 cw(c0.282,16.627) 1.355,16.627 cw(c2.428,16.627) R22.1@1.67,17.386 ; R23.1@1.168,19.526 cw(c0.409,18.767) 1.482,18.767 cw(c2.555,18.767) R23.1@1.797,19.526 ; R22.1@1.212,18.053 ccw(c0.794,18.6) 1.482,18.6 ; C25.2@1.355,15.425 1.355,17.573 R22.1@1.482,17.7 1.482,18.6 ; R23.1@1.482,19.84 1.482,18.6 ; R22.1@1.753,18.053 cw(c2.171,18.6) 1.482,18.6 ; v1@2,18.6 1.482,18.6 ; v1@2.072,18.895 cw(c1.482,19.336) 1.482,18.6
KEYBUTTON03: C26.2 P1.11 R24.1 R25.1 | length 26.4
  Top Layer w0.381: v1@1.543,29.757 cw(c2.063,29.237) 2.063,29.972 ; v1(1.7,29.6) 2.072,29.972 8.088,29.972 P1.11@9.79,28.27 ; v1@1.7,29.759 ccw(c1.7,30.145) 1.972,29.872 ccw(c2.245,29.6) v1@1.859,29.6 ; v1@1.813,29.487 cw(c2.983,28.317) 2.983,29.972 ; 8.338,29.722 ccw(c9.384,30.768) P1.11@9.679,29.318 ; 8.84,29.22 ccw(c9.553,29.934) P1.11@9.754,28.945
  Bottom Layer w0.381: R25.1@1.041,30.714 ccw(c0.277,31.479) 1.358,31.479 ; C26.2@1.043,32.033 cw(c0.284,31.274) 1.358,31.274 cw(c2.431,31.274) C26.2@1.672,32.033 ; R24.1@1.168,28.574 ccw(c0.409,29.333) 1.482,29.333 ccw(c2.555,29.333) R24.1@1.797,28.574 ; R25.1@1.168,30.086 cw(c0.409,29.327) 1.482,29.327 cw(c2.555,29.327) R25.1@1.797,30.086 ; R25.1@1.358,30.525 C26.2@1.358,32.475 ; 1.358,31.468 ccw(c2.423,31.468) R25.1@1.67,30.714 ; R24.1@1.482,28.26 R25.1@1.482,30.4 ccw(c2.36,30.4) v1@1.801,29.723 ; R24.1@1.482,28.69 cw(c2.61,28.69) v1@1.813,29.487